# Altium PCB LED6432Clock.PcbDoc (part 4 of 6)
Units mm, origin at the board's own origin, x right, y up, seen from the top; angles counter-clockwise.
Board outline 152.4 x 101.6 mm, 2 copper layers (Top Layer, Bottom Layer); 48 components, 0 nets, 638 pads, 127 vias.
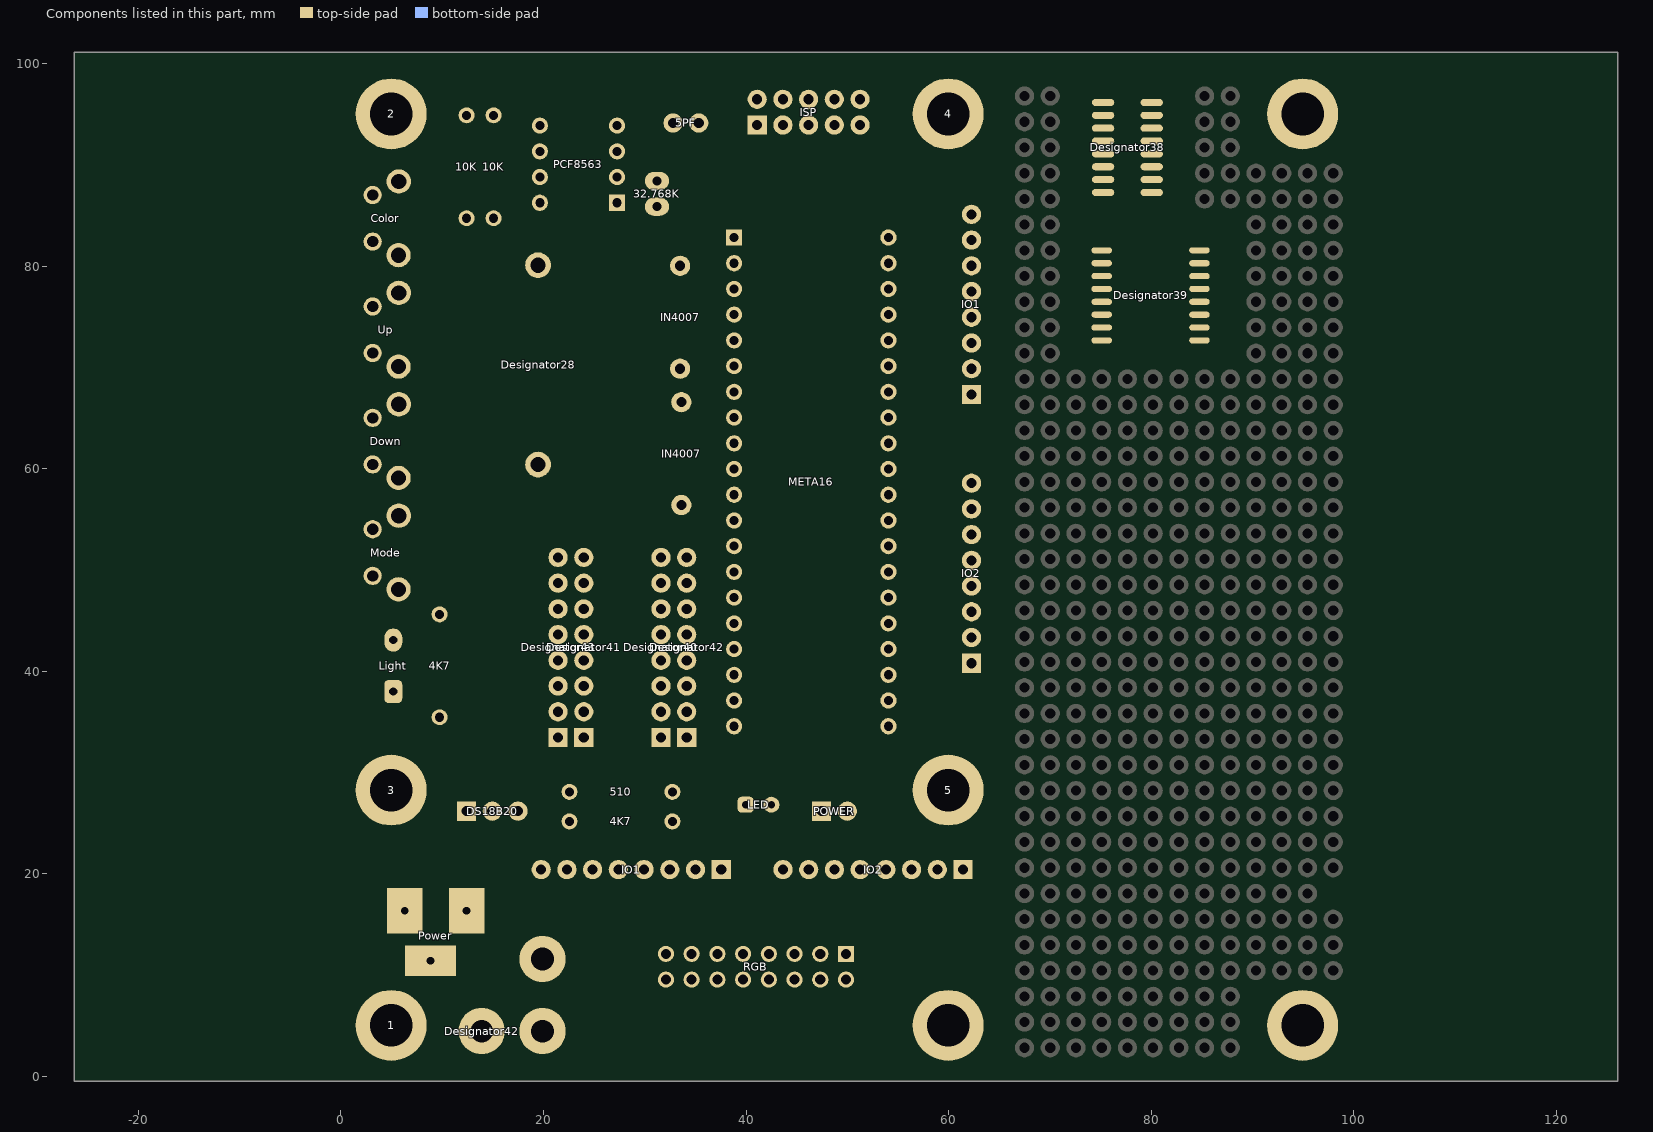
[diagram p4: the components of this part, seen from the top]

## Via types
v1: diameter 0.6, hole 0.3, Top Layer to Bottom Layer, 67 vias
v2: diameter 1.27, hole 0.711, Top Layer to Bottom Layer, 60 vias

## Nets (pads, with @x,y where several pads share a name; then routed paths per layer and width w, separated by ;. In a path a pad name is that pad's centre, name@x,y a point inside that pad or via, vN(x,y) a via of type N, cw(c..) or ccw(c..) an arc to the next point about the centre after c; other vN are vias at no path point) (continued)
copper on no net: (continued)
  Top Layer w0.4: 1.268,37.777 4.941,37.777 5.162,37.998 ; 1.925,30.438 ccw(c3.044,30.738) v2@2.588,29.674 ; v2@2.686,30.062 ccw(c2.81,30.528) 3.156,30.192 ccw(c3.56,29.799) v2@3.003,29.71 ; v2@2.919,29.599 1.268,31.25 ; 2.919,87.053 2.487,87.053 1.268,85.834 ; 3.13,65.022 2.936,64.828 1.268,64.828 ; 3.13,76.022 2.996,76.157 1.192,76.157 ; 3.257,54.022 3.167,53.932 1.268,53.932 ; 5.162,43.078 7.407,43.078 9.734,40.751 9.734,35.458 ; 6.375,27.234 cw(c6.468,26.093) v2@7.311,26.868 ; 6.5,26.347 6.627,26.22 12.139,26.22 ; 6.655,27.547 cw(c6.359,26.61) v2@7.303,26.882 ; 6.968,28.009 ccw(c8.486,27.938) v2@7.363,26.915 ; 7.073,27.486 cw(c6.871,27.069) v2@7.304,26.904 ; v2@7.212,26.445 cw(c8.013,25.798) 8.527,26.689 ; v2@7.353,26.861 cw(c7.782,26.061) 8.246,26.84 ; v2@7.355,26.862 cw(c7.648,26.39) 8.04,26.782 ; v2@7.369,29.628 ccw(c7.853,29.421) 7.558,28.985 ; v2@7.45,26.471 cw(c7.751,25.345) 8.334,26.355 ; v2@7.454,26.472 cw(c7.623,25.87) 8.029,26.346 cw(c8.503,26.902) v2@7.772,26.895 ; 7.485,26.148 cw(c8.045,25.679) 8.41,26.311 cw(c8.782,26.956) 8.077,27.197 ; 7.523,26.193 cw(c8.381,25.501) 8.932,26.456 cw(c9.644,27.689) 8.231,27.863 ; v2@7.542,26.508 cw(c8.171,25.334) 8.854,26.477 ; v2@7.566,26.522 cw(c7.92,25.949) 8.397,26.425 cw(c9.108,27.134) 8.139,27.398 ; 7.59,26.279 cw(c8.193,25.824) 8.089,26.572 ; v2@7.737,29.47 ccw(c8.306,29.226) 7.959,28.713 ; v2@7.757,27.004 ccw(c8.66,27.246) 8.193,26.436 ; 7.834,27.912 ccw(c8.993,27.769) 8.409,26.758 ; 9.65,45.855 9.65,50.706 9.65,55.202 10.132,55.684 10.132,84.285 10.742,84.894 ; 9.967,55.734 cw(c10.519,55.586) v1@10.233,56.08 ; 12.313,94.729 cw(c11.278,92.791) 13.4,93.36 ; 12.401,84.734 15.068,84.734 ; 12.401,94.894 12.401,94.259 14.501,92.159 18.82,92.159 ; 12.502,95.082 cw(c11.873,93.906) 13.161,94.251 ; 12.571,84.894 10.742,84.894 ; 12.83,93.994 cw(c13.603,94.201) 12.91,94.601 ; 15.068,94.894 16.439,94.894 ; 19.276,60.587 19.726,61.036 v1(19.726,69.875) ; 19.455,80.099 22.142,80.099 22.558,80.099 24.915,82.456 24.915,91.533 27.26,93.878 27.26,95.088 ; 19.64,91.338 18.82,92.159 ; 19.64,93.878 17.455,93.878 16.439,94.894 ; 21.359,38.819 23.696,38.819 ; 21.435,33.459 23.62,33.459 ; 21.435,35.999 23.975,35.999 ; 21.435,41.079 23.975,41.079 ; 21.435,43.619 23.975,43.619 ; 21.435,46.159 23.62,46.159 ; 21.435,51.239 23.518,51.239 ; 21.664,48.649 23.925,48.649 ; 22.028,48.24 cw(c22.624,47.778) 22.819,48.506 cw(c23.13,49.666) 22.087,49.071 ; 22.058,33.041 cw(c22.589,32.683) 22.754,33.301 cw(c23.031,34.336) 22.093,33.82 ; 22.058,33.878 ccw(c22.589,34.236) 22.754,33.617 ccw(c23.031,32.583) 22.093,33.098 ; 22.058,35.581 cw(c22.589,35.223) 22.754,35.841 cw(c23.031,36.876) 22.093,36.36 ; 22.058,36.418 ccw(c22.589,36.776) 22.754,36.157 ccw(c23.031,35.123) 22.093,35.638 ; 22.058,40.661 cw(c22.589,40.303) 22.754,40.921 cw(c23.031,41.956) 22.093,41.44 ; 22.058,41.498 ccw(c22.589,41.856) 22.754,41.237 ccw(c23.031,40.203) 22.093,40.718 ; 22.058,43.201 cw(c22.589,42.843) 22.754,43.461 cw(c23.031,44.496) 22.093,43.98 ; 22.058,44.038 ccw(c22.589,44.396) 22.754,43.777 ccw(c23.031,42.743) 22.093,43.258 ; 22.058,45.741 cw(c22.589,45.383) 22.754,46.001 cw(c23.031,47.036) 22.093,46.52 ; 22.058,46.578 ccw(c22.589,46.936) 22.754,46.317 ccw(c23.031,45.283) 22.093,45.798 ; 22.058,50.821 cw(c22.589,50.463) 22.754,51.081 cw(c23.031,52.116) 22.093,51.6 ; 22.058,51.658 ccw(c22.589,52.016) 22.754,51.397 ccw(c23.031,50.363) 22.093,50.878 ; 22.086,49.073 ccw(c22.551,49.34) 22.689,48.822 ccw(c22.933,47.912) 22.099,48.35 ; 26.542,93.435 cw(c27.398,93.206) 27.22,94.074 ; 26.817,93.16 ccw(c26.588,94.016) 27.456,93.838 ; 27.26,86.258 30.816,86.258 31.197,85.877 33.696,85.877 34.313,86.495 34.313,89.136 32.789,90.66 32.789,94.14 ; 27.26,88.798 27.641,88.417 31.197,88.417 ; 27.428,88.689 cw(c27.95,88.35) 28.262,88.889 ; 27.753,88.455 cw(c27.971,88.303) 28.105,88.534 cw(c28.365,88.984) 27.852,88.898 ; 27.763,88.471 cw(c28.305,88.119) 28.627,88.678 ; 29.922,86.106 cw(c29.61,85.564) 30.217,85.712 ; 31.519,33.383 31.595,33.459 34.135,33.459 ; 31.595,35.999 34.135,35.999 ; 31.595,38.539 34.135,38.539 ; 31.595,41.079 34.135,41.079 ; 31.595,46.159 34.135,46.159 ; 31.595,48.699 34.135,48.699 ; 31.595,51.239 34.135,51.239 ; 31.799,43.746 34.008,43.746 ; 32.413,79.027 cw(c33.764,78.666) 33.483,80.035 ; 32.475,78.965 ccw(c32.114,80.316) 33.483,80.035 ; 33.446,43.323 ccw(c33.082,43.166) 32.979,43.55 ccw(c32.784,44.277) 33.461,43.948 ; 33.478,33.098 ccw(c32.54,32.583) 32.817,33.617 ccw(c32.982,34.236) 33.513,33.878 ; 33.478,33.82 cw(c32.54,34.336) 32.817,33.301 cw(c32.982,32.683) 33.513,33.041 ; 33.478,35.638 ccw(c32.54,35.123) 32.817,36.157 ccw(c32.982,36.776) 33.513,36.418 ; 33.478,36.36 cw(c32.54,36.876) 32.817,35.841 cw(c32.982,35.223) 33.513,35.581 ; 33.478,38.178 ccw(c32.54,37.663) 32.817,38.697 ccw(c32.982,39.316) 33.513,38.958 ; 33.478,38.9 cw(c32.54,39.416) 32.817,38.381 cw(c32.982,37.763) 33.513,38.121 ; 33.478,40.718 ccw(c32.54,40.203) 32.817,41.237 ccw(c32.982,41.856) 33.513,41.498 ; 33.478,41.44 cw(c32.54,41.956) 32.817,40.921 cw(c32.982,40.303) 33.513,40.661 ; 33.478,45.798 ccw(c32.54,45.283) 32.817,46.317 ccw(c32.982,46.936) 33.513,46.578 ; 33.478,46.52 cw(c32.54,47.036) 32.817,46.001 cw(c32.982,45.383) 33.513,45.741 ; 33.478,48.338 ccw(c32.54,47.823) 32.817,48.857 ccw(c32.982,49.476) 33.513,49.118 ; 33.478,49.06 cw(c32.54,49.576) 32.817,48.541 cw(c32.982,47.923) 33.513,48.281 ; 33.478,50.878 ccw(c32.54,50.363) 32.817,51.397 ccw(c32.982,52.016) 33.513,51.658 ; 33.478,51.6 cw(c32.54,52.116) 32.817,51.081 cw(c32.982,50.463) 33.513,50.821 ; 33.61,66.573 32.365,66.573 ; 34.09,43.641 cw(c35.859,42.807) 35.353,44.696 ; v1(34.415,31.148) 34.415,33.18 34.135,33.459 ; 34.473,43.525 cw(c35.485,43.243) 35.213,44.258 ; 34.51,44.269 ccw(c34.839,44.837) 35.008,44.203 ; 35.329,94.14 35.329,95.842 ; v1(36.599,45.448) 35.05,43.899 34.034,43.899 33.881,43.746 35.634,43.746 ; 42.5,26.822 v1(42.5,31.106) v1@42.517,31.123 ; 47.453,26.187 v1@47.453,58.419 ; 47.453,58.275 47.453,59.884 v1(47.496,59.926) ; 49.993,26.187 49.993,55.6 ; 49.993,55.278 49.993,59.071 v1(49.993,59.96) 50.01,59.977 50.01,89.644 v1(50.003,89.652) ; 53.884,59.869 ccw(c55.18,60.617) 54.793,59.172 ; 54.057,59.969 54.915,59.969 ; 54.231,60.069 ccw(c56.362,61.3) 55.725,58.922 ; 54.238,60.054 ccw(c55.06,60.441) 54.825,59.564 ; 54.357,59.45 cw(c54.752,58.767) 54.956,59.529 ; 61.837,42.71 cw(c61.479,42.179) 62.097,42.014 cw(c63.132,41.737) 62.616,42.675 ; 61.837,45.25 cw(c61.479,44.719) 62.097,44.554 cw(c63.132,44.277) 62.616,45.215 ; 61.894,42.675 cw(c61.379,41.737) 62.413,42.014 cw(c63.032,42.179) 62.674,42.71 ; 61.894,45.215 cw(c61.379,44.277) 62.413,44.554 cw(c63.032,44.719) 62.674,45.25 ; 62.255,40.792 62.255,45.872 60.477,45.872 ; 1.192,76.157 cw(c1.192,74.187) 2.622,75.541 ccw(c1.192,74.187) 1.192,76.157 ; 1.268,31.249 cw(c-0.197,29.785) 1.79,29.199 ccw(c-0.197,29.785) 1.268,31.249 ; 1.268,31.249 ccw(c2.348,32.33) 3.173,31.044 cw(c2.348,32.33) 1.268,31.249 ; 1.268,31.25 1.268,85.834 ; 1.268,53.932 ccw(c1.268,55.821) 2.627,54.509 cw(c1.268,55.821) 1.268,53.932 ; 1.268,64.828 ccw(c1.268,66.516) 2.584,65.46 cw(c1.268,66.516) 1.268,64.828 ; 1.268,85.834 cw(c2.587,84.515) 2.982,86.338 ccw(c2.587,84.515) 1.268,85.834 ; 2.051,30.509 cw(c1.689,29.735) v2@2.539,29.645 ; 2.051,30.509 cw(c1.689,29.735) v2@2.539,29.645 ; 2.051,30.509 cw(c1.689,29.735) v2@2.539,29.645 ; v2@2.604,29.624 cw(c3.938,28.88) 3.574,30.363 ; v2@2.604,29.624 cw(c3.938,28.88) 3.574,30.363 ; v2@2.604,29.624 cw(c3.938,28.88) 3.574,30.363 ; 5.906,27.513 ccw(c6.739,28.564) v2@7.191,27.301 ; 5.906,27.513 ccw(c6.739,28.564) v2@7.191,27.301 ; 5.906,27.513 ccw(c6.739,28.564) v2@7.191,27.301 ; 5.986,26.977 ccw(c6.388,27.633) v2@6.994,27.159 ; 5.986,26.977 ccw(c6.388,27.633) v2@6.994,27.159 ; 5.986,26.977 ccw(c6.388,27.633) v2@6.994,27.159 ; 6.176,27.876 ccw(c7.43,29.026) v2@7.356,27.326 ; 6.176,27.876 ccw(c7.43,29.026) v2@7.356,27.326 ; 6.176,27.876 ccw(c7.43,29.026) v2@7.356,27.326 ; 6.368,26.743 ccw(c6.743,27.355) v2@7.309,26.913 ; 6.368,26.743 ccw(c6.743,27.355) v2@7.309,26.913 ; 6.368,26.743 ccw(c6.743,27.355) v2@7.309,26.913 ; 6.47,27.066 ccw(c7.025,27.765) v2@7.325,26.924 ; 6.47,27.066 ccw(c7.025,27.765) v2@7.325,26.924 ; 6.47,27.066 ccw(c7.025,27.765) v2@7.325,26.924 ; 6.723,28.456 cw(c5.326,27.532) v2@6.922,27.023 ; 6.723,28.456 cw(c5.326,27.532) v2@6.922,27.023 ; 6.723,28.456 cw(c5.326,27.532) v2@6.922,27.023 ; 6.731,27.841 cw(c5.773,27.191) v2@6.91,26.973 ; 6.731,27.841 cw(c5.773,27.191) v2@6.91,26.973 ; 6.731,27.841 cw(c5.773,27.191) v2@6.91,26.973 ; 6.75,26.509 ccw(c7.099,27.078) v2@7.625,26.667 ; 6.75,26.509 ccw(c7.099,27.078) v2@7.625,26.667 ; 6.75,26.509 ccw(c7.099,27.078) v2@7.625,26.667 ; 6.816,27.716 ccw(c7.596,28.245) v2@7.419,27.319 ; 6.816,27.716 ccw(c7.596,28.245) v2@7.419,27.319 ; 6.816,27.716 ccw(c7.596,28.245) v2@7.419,27.319 ; 6.826,43.078 cw(c6.826,44.742) 5.65,43.566 ccw(c6.826,44.742) 6.826,43.078 ; 6.826,43.078 ccw(c6.826,41.415) 5.65,42.591 cw(c6.826,41.415) 6.826,43.078 ; v2@7.045,26.672 ccw(c7.963,27.363) 7.803,26.225 ; v2@7.045,26.672 ccw(c7.963,27.363) 7.803,26.225 ; v2@7.045,26.672 ccw(c7.963,27.363) 7.803,26.225 ; v2@7.067,27.233 ccw(c6.57,27.861) 7.245,28.294 ; v2@7.067,27.233 ccw(c6.57,27.861) 7.245,28.294 ; v2@7.067,27.233 ccw(c6.57,27.861) 7.245,28.294 ; v2@7.073,27.143 cw(c7.605,26.637) 8.033,27.234 ; v2@7.073,27.143 cw(c7.605,26.637) 8.033,27.234 ; v2@7.073,27.143 cw(c7.605,26.637) 8.033,27.234 ; 7.185,27.759 cw(c6.349,27.206) v2@7.304,26.902 ; 7.185,27.759 cw(c6.349,27.206) v2@7.304,26.902 ; 7.185,27.759 cw(c6.349,27.206) v2@7.304,26.902 ; v2@7.195,29.23 cw(c6.719,27.853) 8.029,28.49 ; v2@7.195,29.23 cw(c6.719,27.853) 8.029,28.49 ; v2@7.195,29.23 cw(c6.719,27.853) 8.029,28.49 ; v2@7.315,26.919 ccw(c6.845,27.513) 7.483,27.921 ; v2@7.315,26.919 ccw(c6.845,27.513) 7.483,27.921 ; v2@7.315,26.919 ccw(c6.845,27.513) 7.483,27.921 ; v2@7.352,26.86 cw(c7.737,26.024) 8.181,26.831 ; v2@7.352,26.86 cw(c7.737,26.024) 8.181,26.831 ; v2@7.352,26.86 cw(c7.737,26.024) 8.181,26.831 ; v2@7.362,26.867 cw(c7.941,26.317) 8.406,26.966 ; v2@7.362,26.867 cw(c7.941,26.317) 8.406,26.966 ; v2@7.362,26.867 cw(c7.941,26.317) 8.406,26.966 ; v2@7.366,26.911 ccw(c8.761,27.872) 8.453,26.206 ; v2@7.366,26.911 ccw(c8.761,27.872) 8.453,26.206 ; v2@7.366,26.911 ccw(c8.761,27.872) 8.453,26.206 ; v2@7.367,26.909 ccw(c8.148,27.359) 7.914,26.489 ; v2@7.367,26.909 ccw(c8.148,27.359) 7.914,26.489 ; v2@7.367,26.909 ccw(c8.148,27.359) 7.914,26.489 ; v2@7.401,29.211 cw(c7.454,28.859) 7.774,29.015 ; v2@7.401,29.211 cw(c7.454,28.859) 7.774,29.015 ; v2@7.401,29.211 cw(c7.454,28.859) 7.774,29.015 ; v2@7.507,26.491 cw(c8.01,25.304) 8.494,26.499 ; v2@7.507,26.491 cw(c8.01,25.304) 8.494,26.499 ; v2@7.507,26.491 cw(c8.01,25.304) 8.494,26.499 ; v2@7.519,26.497 cw(c8.15,25.132) 8.875,26.449 ; v2@7.519,26.497 cw(c8.15,25.132) 8.875,26.449 ; v2@7.519,26.497 cw(c8.15,25.132) 8.875,26.449 ; v2@7.563,26.605 ccw(c7.121,27.165) 7.721,27.549 ; v2@7.563,26.605 ccw(c7.121,27.165) 7.721,27.549 ; v2@7.563,26.605 ccw(c7.121,27.165) 7.721,27.549 ; v2@7.652,26.592 cw(c8.277,25.997) 8.78,26.698 ; v2@7.652,26.592 cw(c8.277,25.997) 8.78,26.698 ; v2@7.652,26.592 cw(c8.277,25.997) 8.78,26.698 ; v2@7.714,27.109 ccw(c9.331,28.041) 8.847,26.238 ; v2@7.714,27.109 ccw(c9.331,28.041) 8.847,26.238 ; v2@7.714,27.109 ccw(c9.331,28.041) 8.847,26.238 ; v2@7.737,27.061 ccw(c8.484,27.378) 8.18,26.626 ; v2@7.737,27.061 ccw(c8.484,27.378) 8.18,26.626 ; v2@7.737,27.061 ccw(c8.484,27.378) 8.18,26.626 ; v2@7.747,29.496 ccw(c8.336,29.288) 7.774,29.015 ; v2@7.747,29.496 ccw(c8.336,29.288) 7.774,29.015 ; v2@7.747,29.496 ccw(c8.336,29.288) 7.774,29.015 ; v2@7.748,29.499 ccw(c8.356,29.289) 7.777,29.008 ; v2@7.748,29.499 ccw(c8.356,29.289) 7.777,29.008 ; v2@7.748,29.499 ccw(c8.356,29.289) 7.777,29.008 ; 9.734,36.877 cw(c8.316,36.877) 9.319,35.874 ccw(c8.316,36.877) 9.734,36.877 ; 9.734,36.877 ccw(c11.153,36.877) 10.15,35.874 cw(c11.153,36.877) 9.734,36.877 ; 10.556,26.398 ccw(c10.84,28.069) 11.922,26.765 ; 10.556,26.398 ccw(c10.84,28.069) 11.922,26.765 ; 10.556,26.398 ccw(c10.84,28.069) 11.922,26.765 ; 10.568,26.583 ccw(c10.996,28.437) 12.004,26.823 ; 10.568,26.583 ccw(c10.996,28.437) 12.004,26.823 ; 10.568,26.583 ccw(c10.996,28.437) 12.004,26.823 ; 10.695,26.554 cw(c10.308,24.879) 11.765,25.79 ; 10.695,26.554 cw(c10.308,24.879) 11.765,25.79 ; 10.695,26.554 cw(c10.308,24.879) 11.765,25.79 ; 10.742,84.894 cw(c10.742,83.266) 11.961,84.345 ccw(c10.742,83.266) 10.742,84.894 ; 10.84,26.349 cw(c10.595,24.905) 11.79,25.753 ; 10.84,26.349 cw(c10.595,24.905) 11.79,25.753 ; 10.84,26.349 cw(c10.595,24.905) 11.79,25.753 ; 11.415,26.252 ccw(c11.574,27.185) 12.178,26.457 ; 11.415,26.252 ccw(c11.574,27.185) 12.178,26.457 ; 11.415,26.252 ccw(c11.574,27.185) 12.178,26.457 ; 12.139,26.22 cw(c12.139,30.419) 8.116,29.214 ccw(c12.139,30.419) 12.139,26.22 ; 13.65,84.734 cw(c13.65,83.316) 14.653,84.319 ccw(c13.65,83.316) 13.65,84.734 ; 13.65,84.734 ccw(c13.65,86.153) 14.653,85.15 cw(c13.65,86.153) 13.65,84.734 ; 13.82,84.734 cw(c13.82,86.153) 12.817,85.15 ccw(c13.82,86.153) 13.82,84.734 ; 13.82,84.734 ccw(c13.82,83.316) 12.817,84.319 cw(c13.82,83.316) 13.82,84.734 ; 16.439,94.894 cw(c16.439,96.2) 15.494,95.3 ccw(c16.439,96.2) 16.439,94.894 ; 16.439,94.894 ccw(c16.439,93.589) 15.494,94.489 cw(c16.439,93.589) 16.439,94.894 ; 18.192,93.878 cw(c18.192,92.43) 19.216,93.454 ccw(c18.192,92.43) 18.192,93.878 ; 18.192,93.878 ccw(c18.192,95.327) 19.216,94.303 cw(c18.192,95.327) 18.192,93.878 ; 18.82,92.159 cw(c18.239,91.578) 19.049,91.439 ccw(c18.239,91.578) 18.82,92.159 ; 18.82,92.159 ccw(c19.401,92.74) 19.539,91.93 cw(c19.401,92.74) 18.82,92.159 ; 21.073,80.099 cw(c21.073,81.716) 19.929,80.573 ccw(c21.073,81.716) 21.073,80.099 ; 21.073,80.099 ccw(c21.073,78.481) 19.929,79.625 cw(c21.073,78.481) 21.073,80.099 ; 22.039,80.099 cw(c22.039,82.682) 20.212,80.856 ccw(c22.039,82.682) 22.039,80.099 ; 22.039,80.099 ccw(c22.039,77.516) 20.212,79.342 cw(c22.039,77.516) 22.039,80.099 ; 22.165,33.459 cw(c22.165,31.649) 23.445,32.929 ccw(c22.165,31.649) 22.165,33.459 ; 22.165,33.459 ccw(c22.165,35.27) 23.445,33.99 cw(c22.165,35.27) 22.165,33.459 ; 22.165,35.999 cw(c22.165,34.189) 23.445,35.469 ccw(c22.165,34.189) 22.165,35.999 ; 22.165,35.999 ccw(c22.165,37.81) 23.445,36.53 cw(c22.165,37.81) 22.165,35.999 ; 22.165,41.079 cw(c22.165,39.269) 23.445,40.549 ccw(c22.165,39.269) 22.165,41.079 ; 22.165,41.079 ccw(c22.165,42.89) 23.445,41.61 cw(c22.165,42.89) 22.165,41.079 ; 22.165,43.619 cw(c22.165,41.809) 23.445,43.089 ccw(c22.165,41.809) 22.165,43.619 ; 22.165,43.619 ccw(c22.165,45.43) 23.445,44.15 cw(c22.165,45.43) 22.165,43.619 ; 22.165,46.159 cw(c22.165,44.349) 23.445,45.629 ccw(c22.165,44.349) 22.165,46.159 ; 22.165,46.159 ccw(c22.165,47.97) 23.445,46.69 cw(c22.165,47.97) 22.165,46.159 ; 22.165,51.239 cw(c22.165,49.429) 23.445,50.709 ccw(c22.165,49.429) 22.165,51.239 ; 22.165,51.239 ccw(c22.165,53.05) 23.445,51.77 cw(c22.165,53.05) 22.165,51.239 ; 22.592,48.506 cw(c22.787,47.778) 23.383,48.24 ; 22.592,48.506 ccw(c22.281,49.666) 23.324,49.071 ; 22.592,48.506 cw(c22.787,47.778) 23.383,48.24 ; 22.592,48.506 ccw(c22.281,49.666) 23.324,49.071 ; 22.592,48.506 cw(c22.787,47.778) 23.383,48.24 ; 22.592,48.506 ccw(c22.281,49.666) 23.324,49.071 ; 22.657,33.301 cw(c22.822,32.683) 23.353,33.041 ; 22.657,33.301 ccw(c22.38,34.336) 23.318,33.82 ; 22.657,33.301 cw(c22.822,32.683) 23.353,33.041 ; 22.657,33.301 ccw(c22.38,34.336) 23.318,33.82 ; 22.657,33.301 cw(c22.822,32.683) 23.353,33.041 ; 22.657,33.301 ccw(c22.38,34.336) 23.318,33.82 ; 22.657,33.617 cw(c22.38,32.583) 23.318,33.098 ; 22.657,33.617 ccw(c22.822,34.236) 23.353,33.878 ; 22.657,33.617 cw(c22.38,32.583) 23.318,33.098 ; 22.657,33.617 ccw(c22.822,34.236) 23.353,33.878 ; 22.657,33.617 cw(c22.38,32.583) 23.318,33.098 ; 22.657,33.617 ccw(c22.822,34.236) 23.353,33.878 ; 22.657,35.841 cw(c22.822,35.223) 23.353,35.581 ; 22.657,35.841 ccw(c22.38,36.876) 23.318,36.36 ; 22.657,35.841 cw(c22.822,35.223) 23.353,35.581 ; 22.657,35.841 ccw(c22.38,36.876) 23.318,36.36 ; 22.657,35.841 cw(c22.822,35.223) 23.353,35.581 ; 22.657,35.841 ccw(c22.38,36.876) 23.318,36.36 ; 22.657,36.157 cw(c22.38,35.123) 23.318,35.638 ; 22.657,36.157 ccw(c22.822,36.776) 23.353,36.418 ; 22.657,36.157 cw(c22.38,35.123) 23.318,35.638 ; 22.657,36.157 ccw(c22.822,36.776) 23.353,36.418 ; 22.657,36.157 cw(c22.38,35.123) 23.318,35.638 ; 22.657,36.157 ccw(c22.822,36.776) 23.353,36.418 ; 22.657,40.921 cw(c22.822,40.303) 23.353,40.661 ; 22.657,40.921 ccw(c22.38,41.956) 23.318,41.44 ; 22.657,40.921 cw(c22.822,40.303) 23.353,40.661 ; 22.657,40.921 ccw(c22.38,41.956) 23.318,41.44 ; 22.657,40.921 cw(c22.822,40.303) 23.353,40.661 ; 22.657,40.921 ccw(c22.38,41.956) 23.318,41.44 ; 22.657,41.237 cw(c22.38,40.203) 23.318,40.718 ; 22.657,41.237 ccw(c22.822,41.856) 23.353,41.498 ; 22.657,41.237 cw(c22.38,40.203) 23.318,40.718 ; 22.657,41.237 ccw(c22.822,41.856) 23.353,41.498 ; 22.657,41.237 cw(c22.38,40.203) 23.318,40.718 ; 22.657,41.237 ccw(c22.822,41.856) 23.353,41.498 ; 22.657,43.461 cw(c22.822,42.843) 23.353,43.201 ; 22.657,43.461 ccw(c22.38,44.496) 23.318,43.98 ; 22.657,43.461 cw(c22.822,42.843) 23.353,43.201 ; 22.657,43.461 ccw(c22.38,44.496) 23.318,43.98 ; 22.657,43.461 cw(c22.822,42.843) 23.353,43.201 ; 22.657,43.461 ccw(c22.38,44.496) 23.318,43.98 ; 22.657,43.777 cw(c22.38,42.743) 23.318,43.258 ; 22.657,43.777 ccw(c22.822,44.396) 23.353,44.038 ; 22.657,43.777 cw(c22.38,42.743) 23.318,43.258 ; 22.657,43.777 ccw(c22.822,44.396) 23.353,44.038 ; 22.657,43.777 cw(c22.38,42.743) 23.318,43.258 ; 22.657,43.777 ccw(c22.822,44.396) 23.353,44.038 ; 22.657,46.001 cw(c22.822,45.383) 23.353,45.741 ; 22.657,46.001 ccw(c22.38,47.036) 23.318,46.52 ; 22.657,46.001 cw(c22.822,45.383) 23.353,45.741 ; 22.657,46.001 ccw(c22.38,47.036) 23.318,46.52 ; 22.657,46.001 cw(c22.822,45.383) 23.353,45.741 ; 22.657,46.001 ccw(c22.38,47.036) 23.318,46.52 ; 22.657,46.317 cw(c22.38,45.283) 23.318,45.798 ; 22.657,46.317 ccw(c22.822,46.936) 23.353,46.578 ; 22.657,46.317 cw(c22.38,45.283) 23.318,45.798 ; 22.657,46.317 ccw(c22.822,46.936) 23.353,46.578 ; 22.657,46.317 cw(c22.38,45.283) 23.318,45.798 ; 22.657,46.317 ccw(c22.822,46.936) 23.353,46.578 ; 22.657,51.081 cw(c22.822,50.463) 23.353,50.821 ; 22.657,51.081 ccw(c22.38,52.116) 23.318,51.6 ; 22.657,51.081 cw(c22.822,50.463) 23.353,50.821 ; 22.657,51.081 ccw(c22.38,52.116) 23.318,51.6 ; 22.657,51.081 cw(c22.822,50.463) 23.353,50.821 ; 22.657,51.081 ccw(c22.38,52.116) 23.318,51.6 ; 22.657,51.397 cw(c22.38,50.363) 23.318,50.878 ; 22.657,51.397 ccw(c22.822,52.016) 23.353,51.658 ; 22.657,51.397 cw(c22.38,50.363) 23.318,50.878 ; 22.657,51.397 ccw(c22.822,52.016) 23.353,51.658 ; 22.657,51.397 cw(c22.38,50.363) 23.318,50.878 ; 22.657,51.397 ccw(c22.822,52.016) 23.353,51.658 ; 22.722,48.822 cw(c22.478,47.912) 23.312,48.35 ; 22.721,48.822 ccw(c22.86,49.34) 23.325,49.073 ; 22.722,48.822 cw(c22.478,47.912) 23.312,48.35 ; 22.721,48.822 ccw(c22.86,49.34) 23.325,49.073 ; 22.722,48.822 cw(c22.478,47.912) 23.312,48.35 ; 22.721,48.822 ccw(c22.86,49.34) 23.325,49.073 ; 23.246,33.459 cw(c23.246,35.27) 21.966,33.99 ccw(c23.246,35.27) 23.246,33.459 ; 23.246,33.459 ccw(c23.246,31.649) 21.966,32.929 cw(c23.246,31.649) 23.246,33.459 ; 23.246,35.999 cw(c23.246,37.81) 21.966,36.53 ccw(c23.246,37.81) 23.246,35.999 ; 23.246,35.999 ccw(c23.246,34.189) 21.966,35.469 cw(c23.246,34.189) 23.246,35.999 ; 23.246,41.079 cw(c23.246,42.89) 21.966,41.61 ccw(c23.246,42.89) 23.246,41.079 ; 23.246,41.079 ccw(c23.246,39.269) 21.966,40.549 cw(c23.246,39.269) 23.246,41.079 ; 23.246,43.619 cw(c23.246,45.43) 21.966,44.15 ccw(c23.246,45.43) 23.246,43.619 ; 23.246,43.619 ccw(c23.246,41.809) 21.966,43.089 cw(c23.246,41.809) 23.246,43.619 ; 23.246,46.159 cw(c23.246,47.97) 21.966,46.69 ccw(c23.246,47.97) 23.246,46.159 ; 23.246,46.159 ccw(c23.246,44.349) 21.966,45.629 cw(c23.246,44.349) 23.246,46.159 ; 23.246,51.239 cw(c23.246,53.05) 21.966,51.77 ccw(c23.246,53.05) 23.246,51.239 ; 23.246,51.239 ccw(c23.246,49.429) 21.966,50.709 cw(c23.246,49.429) 23.246,51.239 ; 23.696,38.819 ccw(c23.696,36.572) 22.001,38.047 cw(c23.696,36.572) 23.696,38.819 ; 26.236,92.854 cw(c27.26,91.83) 27.26,93.278 ccw(c27.26,91.83) 26.236,92.854 ; 26.236,92.854 ccw(c25.212,93.878) 26.66,93.878 cw(c25.212,93.878) 26.236,92.854 ; 27.26,95.088 cw(c26.341,95.088) 26.897,94.356 ccw(c26.341,95.088) 27.26,95.088 ; 27.26,95.088 ccw(c28.18,95.088) 27.623,94.356 cw(c28.18,95.088) 27.26,95.088 ; 27.26,95.088 28.573,96.401 34.77,96.401 35.329,95.842 ; 28.709,86.258 cw(c28.709,87.707) 27.685,86.683 ccw(c28.709,87.707) 28.709,86.258 ; 28.709,86.258 ccw(c28.709,84.81) 27.685,85.834 cw(c28.709,84.81) 28.709,86.258 ; 29.207,88.417 cw(c29.207,86.727) 30.402,87.922 ccw(c29.207,86.727) 29.207,88.417 ; 29.207,88.417 ccw(c29.207,90.107) 30.402,88.912 cw(c29.207,90.107) 29.207,88.417 ; 32.118,78.67 cw(c33.483,77.304) 33.483,79.235 ccw(c33.483,77.304) 32.118,78.67 ; 32.118,78.67 ccw(c30.752,80.035) 32.683,80.035 cw(c30.752,80.035) 32.118,78.67 ; 32.218,33.041 cw(c32.749,32.683) 32.914,33.301 ; 32.218,33.041 cw(c32.749,32.683) 32.914,33.301 ; 32.218,33.041 cw(c32.749,32.683) 32.914,33.301 ; 32.218,33.878 ccw(c32.749,34.236) 32.914,33.617 ; 32.218,33.878 ccw(c32.749,34.236) 32.914,33.617 ; 32.218,33.878 ccw(c32.749,34.236) 32.914,33.617 ; 32.218,35.581 cw(c32.749,35.223) 32.914,35.841 ; 32.218,35.581 cw(c32.749,35.223) 32.914,35.841 ; 32.218,35.581 cw(c32.749,35.223) 32.914,35.841 ; 32.218,36.418 ccw(c32.749,36.776) 32.914,36.157 ; 32.218,36.418 ccw(c32.749,36.776) 32.914,36.157 ; 32.218,36.418 ccw(c32.749,36.776) 32.914,36.157 ; 32.218,38.121 cw(c32.749,37.763) 32.914,38.381 ; 32.218,38.121 cw(c32.749,37.763) 32.914,38.381 ; 32.218,38.121 cw(c32.749,37.763) 32.914,38.381 ; 32.218,38.958 ccw(c32.749,39.316) 32.914,38.697 ; 32.218,38.958 ccw(c32.749,39.316) 32.914,38.697 ; 32.218,38.958 ccw(c32.749,39.316) 32.914,38.697 ; 32.218,40.661 cw(c32.749,40.303) 32.914,40.921 ; 32.218,40.661 cw(c32.749,40.303) 32.914,40.921 ; 32.218,40.661 cw(c32.749,40.303) 32.914,40.921 ; 32.218,41.498 ccw(c32.749,41.856) 32.914,41.237 ; 32.218,41.498 ccw(c32.749,41.856) 32.914,41.237 ; 32.218,41.498 ccw(c32.749,41.856) 32.914,41.237 ; 32.218,45.741 cw(c32.749,45.383) 32.914,46.001 ; 32.218,45.741 cw(c32.749,45.383) 32.914,46.001 ; 32.218,45.741 cw(c32.749,45.383) 32.914,46.001 ; 32.218,46.578 ccw(c32.749,46.936) 32.914,46.317 ; 32.218,46.578 ccw(c32.749,46.936) 32.914,46.317 ; 32.218,46.578 ccw(c32.749,46.936) 32.914,46.317 ; 32.218,48.281 cw(c32.749,47.923) 32.914,48.541 ; 32.218,48.281 cw(c32.749,47.923) 32.914,48.541 ; 32.218,48.281 cw(c32.749,47.923) 32.914,48.541 ; 32.218,49.118 ccw(c32.749,49.476) 32.914,48.857 ; 32.218,49.118 ccw(c32.749,49.476) 32.914,48.857 ; 32.218,49.118 ccw(c32.749,49.476) 32.914,48.857 ; 32.218,50.821 cw(c32.749,50.463) 32.914,51.081 ; 32.218,50.821 cw(c32.749,50.463) 32.914,51.081 ; 32.218,50.821 cw(c32.749,50.463) 32.914,51.081 ; 32.218,51.658 ccw(c32.749,52.016) 32.914,51.397 ; 32.218,51.658 ccw(c32.749,52.016) 32.914,51.397 ; 32.218,51.658 ccw(c32.749,52.016) 32.914,51.397 ; 32.253,33.098 cw(c33.191,32.583) 32.914,33.617 ; 32.253,33.098 cw(c33.191,32.583) 32.914,33.617 ; 32.253,33.098 cw(c33.191,32.583) 32.914,33.617 ; 32.253,33.82 ccw(c33.191,34.336) 32.914,33.301 ; 32.253,33.82 ccw(c33.191,34.336) 32.914,33.301 ; 32.253,33.82 ccw(c33.191,34.336) 32.914,33.301 ; 32.253,35.638 cw(c33.191,35.123) 32.914,36.157 ; 32.253,35.638 cw(c33.191,35.123) 32.914,36.157 ; 32.253,35.638 cw(c33.191,35.123) 32.914,36.157 ; 32.253,36.36 ccw(c33.191,36.876) 32.914,35.841 ; 32.253,36.36 ccw(c33.191,36.876) 32.914,35.841 ; 32.253,36.36 ccw(c33.191,36.876) 32.914,35.841 ; 32.253,38.178 cw(c33.191,37.663) 32.914,38.697 ; 32.253,38.178 cw(c33.191,37.663) 32.914,38.697 ; 32.253,38.178 cw(c33.191,37.663) 32.914,38.697 ; 32.253,38.9 ccw(c33.191,39.416) 32.914,38.381 ; 32.253,38.9 ccw(c33.191,39.416) 32.914,38.381 ; 32.253,38.9 ccw(c33.191,39.416) 32.914,38.381 ; 32.253,40.718 cw(c33.191,40.203) 32.914,41.237 ; 32.253,40.718 cw(c33.191,40.203) 32.914,41.237 ; 32.253,40.718 cw(c33.191,40.203) 32.914,41.237 ; 32.253,41.44 ccw(c33.191,41.956) 32.914,40.921 ; 32.253,41.44 ccw(c33.191,41.956) 32.914,40.921 ; 32.253,41.44 ccw(c33.191,41.956) 32.914,40.921 ; 32.253,45.798 cw(c33.191,45.283) 32.914,46.317 ; 32.253,45.798 cw(c33.191,45.283) 32.914,46.317 ; 32.253,45.798 cw(c33.191,45.283) 32.914,46.317 ; 32.253,46.52 ccw(c33.191,47.036) 32.914,46.001 ; 32.253,46.52 ccw(c33.191,47.036) 32.914,46.001 ; 32.253,46.52 ccw(c33.191,47.036) 32.914,46.001 ; 32.253,48.338 cw(c33.191,47.823) 32.914,48.857 ; 32.253,48.338 cw(c33.191,47.823) 32.914,48.857 ; 32.253,48.338 cw(c33.191,47.823) 32.914,48.857 ; 32.253,49.06 ccw(c33.191,49.576) 32.914,48.541 ; 32.253,49.06 ccw(c33.191,49.576) 32.914,48.541 ; 32.253,49.06 ccw(c33.191,49.576) 32.914,48.541 ; 32.253,50.878 cw(c33.191,50.363) 32.914,51.397 ; 32.253,50.878 cw(c33.191,50.363) 32.914,51.397 ; 32.253,50.878 cw(c33.191,50.363) 32.914,51.397 ; 32.253,51.6 ccw(c33.191,52.116) 32.914,51.081 ; 32.253,51.6 ccw(c33.191,52.116) 32.914,51.081 ; 32.253,51.6 ccw(c33.191,52.116) 32.914,51.081 ; 32.27,43.948 ccw(c32.947,44.277) 32.752,43.55 ; 32.27,43.948 ccw(c32.947,44.277) 32.752,43.55 ; 32.27,43.948 ccw(c32.947,44.277) 32.752,43.55 ; 32.284,43.323 cw(c32.649,43.166) 32.752,43.55 ; 32.284,43.323 cw(c32.649,43.166) 32.752,43.55 ; 32.284,43.323 cw(c32.649,43.166) 32.752,43.55 ; 32.325,33.459 cw(c32.325,31.649) 33.605,32.929 ccw(c32.325,31.649) 32.325,33.459 ; 32.325,33.459 ccw(c32.325,35.27) 33.605,33.99 cw(c32.325,35.27) 32.325,33.459 ; 32.325,35.999 cw(c32.325,34.189) 33.605,35.469 ccw(c32.325,34.189) 32.325,35.999 ; 32.325,35.999 ccw(c32.325,37.81) 33.605,36.53 cw(c32.325,37.81) 32.325,35.999 ; 32.325,38.539 cw(c32.325,36.729) 33.605,38.009 ccw(c32.325,36.729) 32.325,38.539 ; 32.325,38.539 ccw(c32.325,40.35) 33.605,39.07 cw(c32.325,40.35) 32.325,38.539 ; 32.325,41.079 cw(c32.325,39.269) 33.605,40.549 ccw(c32.325,39.269) 32.325,41.079 ; 32.325,41.079 ccw(c32.325,42.89) 33.605,41.61 cw(c32.325,42.89) 32.325,41.079 ; 32.325,46.159 cw(c32.325,44.349) 33.605,45.629 ccw(c32.325,44.349) 32.325,46.159 ; 32.325,46.159 ccw(c32.325,47.97) 33.605,46.69 cw(c32.325,47.97) 32.325,46.159 ; 32.325,48.699 cw(c32.325,46.889) 33.605,48.169 ccw(c32.325,46.889) 32.325,48.699 ; 32.325,48.699 ccw(c32.325,50.51) 33.605,49.23 cw(c32.325,50.51) 32.325,48.699 ; 32.325,51.239 cw(c32.325,49.429) 33.605,50.709 ccw(c32.325,49.429) 32.325,51.239 ; 32.325,51.239 ccw(c32.325,53.05) 33.605,51.77 cw(c32.325,53.05) 32.325,51.239 ; 32.365,66.573 cw(c32.365,66.004) 32.883,66.241 ccw(c32.365,66.004) 32.365,66.573 ; 32.365,66.573 ccw(c32.365,67.143) 32.883,66.906 cw(c32.365,67.143) 32.365,66.573 ; 32.365,66.573 31.494,67.445 31.494,78.046 33.483,80.035 ; 32.789,92.329 cw(c34.6,92.329) 33.32,93.61 ccw(c34.6,92.329) 32.789,92.329 ; 32.789,92.329 ccw(c30.979,92.329) 32.259,93.61 cw(c30.979,92.329) 32.789,92.329 ; 33.187,85.877 cw(c33.187,87.567) 31.992,86.372 ccw(c33.187,87.567) 33.187,85.877 ; 33.187,85.877 ccw(c33.187,84.187) 31.992,85.382 cw(c33.187,84.187) 33.187,85.877 ; 33.406,33.459 cw(c33.406,35.27) 32.126,33.99 ccw(c33.406,35.27) 33.406,33.459 ; 33.406,33.459 ccw(c33.406,31.649) 32.126,32.929 cw(c33.406,31.649) 33.406,33.459 ; 33.406,35.999 cw(c33.406,37.81) 32.126,36.53 ccw(c33.406,37.81) 33.406,35.999 ; 33.406,35.999 ccw(c33.406,34.189) 32.126,35.469 cw(c33.406,34.189) 33.406,35.999 ; 33.406,38.539 cw(c33.406,40.35) 32.126,39.07 ccw(c33.406,40.35) 33.406,38.539 ; 33.406,38.539 ccw(c33.406,36.729) 32.126,38.009 cw(c33.406,36.729) 33.406,38.539 ; 33.406,41.079 cw(c33.406,42.89) 32.126,41.61 ccw(c33.406,42.89) 33.406,41.079 ; 33.406,41.079 ccw(c33.406,39.269) 32.126,40.549 cw(c33.406,39.269) 33.406,41.079 ; 33.406,46.159 cw(c33.406,47.97) 32.126,46.69 ccw(c33.406,47.97) 33.406,46.159 ; 33.406,46.159 ccw(c33.406,44.349) 32.126,45.629 cw(c33.406,44.349) 33.406,46.159 ; 33.406,48.699 cw(c33.406,50.51) 32.126,49.23 ccw(c33.406,50.51) 33.406,48.699 ; 33.406,48.699 ccw(c33.406,46.889) 32.126,48.169 cw(c33.406,46.889) 33.406,48.699 ; 33.406,51.239 cw(c33.406,53.05) 32.126,51.77 ccw(c33.406,53.05) 33.406,51.239 ; 33.406,51.239 ccw(c33.406,49.429) 32.126,50.709 cw(c33.406,49.429) 33.406,51.239 ; 34.135,33.459 34.339,33.663 35.99,33.663 ; 35.329,95.842 cw(c33.774,95.842) 34.823,94.694 ccw(c33.774,95.842) 35.329,95.842 ; 35.329,95.842 ccw(c36.885,95.842) 35.835,94.694 cw(c36.885,95.842) 35.329,95.842 ; 35.634,43.746 cw(c35.634,45.11) 34.667,44.148 ccw(c35.634,45.11) 35.634,43.746 ; 35.634,43.746 ccw(c35.634,42.778) 34.789,43.252 cw(c35.634,42.778) 35.634,43.746 ; 35.634,43.746 36.244,43.137 36.244,33.917 35.99,33.663 ; 35.99,33.663 ccw(c35.99,32.133) 34.745,33.023 cw(c35.99,32.133) 35.99,33.663 ; 36.348,45.253 ccw(c36.163,45.547) v1@36.502,45.47 ; 36.348,45.253 ccw(c36.163,45.547) v1@36.502,45.47 ; 36.348,45.253 ccw(c36.163,45.547) v1@36.502,45.47 ; 42.5,28.241 cw(c41.082,28.241) 42.085,27.238 ccw(c41.082,28.241) 42.5,28.241 ; 42.5,28.241 ccw(c43.919,28.241) 42.916,27.238 cw(c43.919,28.241) 42.5,28.241 ; 47.453,27.998 cw(c45.643,27.998) 46.923,26.718 ccw(c45.643,27.998) 47.453,27.998 ; 47.453,27.998 ccw(c49.264,27.998) 47.984,26.718 cw(c49.264,27.998) 47.453,27.998 ; 49.993,27.998 cw(c48.183,27.998) 49.463,26.718 ccw(c48.183,27.998) 49.993,27.998 ; 49.993,27.998 ccw(c51.804,27.998) 50.524,26.718 cw(c51.804,27.998) 49.993,27.998 ; 54.915,59.969 cw(c54.915,60.282) 54.621,60.175 ccw(c54.915,60.282) 54.915,59.969 ; 54.915,59.969 ccw(c54.915,59.657) 54.621,59.764 cw(c54.915,59.657) 54.915,59.969 ; 54.915,59.969 59.233,55.651 59.233,47.117 60.477,45.872 ; 60.477,45.872 cw(c60.477,44.14) 61.718,45.349 ccw(c60.477,44.14) 60.477,45.872 ; 60.477,45.872 ccw(c60.477,47.605) 61.718,46.396 cw(c60.477,47.605) 60.477,45.872 ; 61.837,41.415 ccw(c61.479,41.946) 62.097,42.111 ; 61.837,41.415 ccw(c61.479,41.946) 62.097,42.111 ; 61.837,41.415 ccw(c61.479,41.946) 62.097,42.111 ; 61.837,43.955 ccw(c61.479,44.486) 62.097,44.651 ; 61.837,43.955 ccw(c61.479,44.486) 62.097,44.651 ; 61.837,43.955 ccw(c61.479,44.486) 62.097,44.651 ; 61.894,41.45 ccw(c61.379,42.388) 62.413,42.111 ; 61.894,41.45 ccw(c61.379,42.388) 62.413,42.111 ; 61.894,41.45 ccw(c61.379,42.388) 62.413,42.111 ; 61.894,43.99 ccw(c61.379,44.928) 62.413,44.651 ; 61.894,43.99 ccw(c61.379,44.928) 62.413,44.651 ; 61.894,43.99 ccw(c61.379,44.928) 62.413,44.651 ; 62.097,42.111 ccw(c63.132,42.388) 62.616,41.45 ; 62.097,42.111 ccw(c63.132,42.388) 62.616,41.45 ; 62.097,42.111 ccw(c63.132,42.388) 62.616,41.45 ; 62.097,44.651 ccw(c63.132,44.928) 62.616,43.99 ; 62.097,44.651 ccw(c63.132,44.928) 62.616,43.99 ; 62.097,44.651 ccw(c63.132,44.928) 62.616,43.99 ; 62.255,41.522 cw(c64.066,41.522) 62.786,42.802 ccw(c64.066,41.522) 62.255,41.522 ; 62.255,41.522 ccw(c60.445,41.522) 61.725,42.802 cw(c60.445,41.522) 62.255,41.522 ; 62.255,42.603 cw(c60.445,42.603) 61.725,41.323 ccw(c60.445,42.603) 62.255,42.603 ; 62.255,42.603 ccw(c64.066,42.603) 62.786,41.323 cw(c64.066,42.603) 62.255,42.603 ; 62.255,44.062 cw(c64.066,44.062) 62.786,45.342 ccw(c64.066,44.062) 62.255,44.062 ; 62.255,44.062 ccw(c60.445,44.062) 61.725,45.342 cw(c60.445,44.062) 62.255,44.062 ; 62.255,45.143 cw(c60.445,45.143) 61.725,43.863 ccw(c60.445,45.143) 62.255,45.143 ; 62.255,45.143 ccw(c64.066,45.143) 62.786,43.863 cw(c64.066,45.143) 62.255,45.143 ; 62.413,42.111 ccw(c63.032,41.946) 62.674,41.415 ; 62.413,42.111 ccw(c63.032,41.946) 62.674,41.415 ; 62.413,42.111 ccw(c63.032,41.946) 62.674,41.415 ; 62.413,44.651 ccw(c63.032,44.486) 62.674,43.955 ; 62.413,44.651 ccw(c63.032,44.486) 62.674,43.955 ; 62.413,44.651 ccw(c63.032,44.486) 62.674,43.955 ; 1.618,30.9 cw(c0.359,29.641) 2.139,29.641 ccw(c0.359,29.641) 1.618,30.9 ; 1.619,30.898 ccw(c2.623,31.902) 3.389,30.707 cw(c2.623,31.902) 1.619,30.898 ; 1.659,53.932 cw(c1.659,52.551) 2.635,53.527 ccw(c1.659,52.551) 1.659,53.932 ; 1.744,30.773 cw(c0.539,29.568) 2.174,29.086 ccw(c0.539,29.568) 1.744,30.773 ; 1.765,76.157 ccw(c1.765,77.388) 2.635,76.517 cw(c1.765,77.388) 1.765,76.157 ; 1.786,86.353 cw(c2.772,85.367) 3.067,86.729 ccw(c2.772,85.367) 1.786,86.353 ; 1.909,64.828 cw(c1.909,63.801) 2.635,64.527 ccw(c1.909,63.801) 1.909,64.828 ; 1.97,30.547 ccw(c2.897,31.474) 3.605,30.371 cw(c2.897,31.474) 1.97,30.547 ; 2.101,64.828 ccw(c2.101,65.848) 2.896,65.21 cw(c2.101,65.848) 2.101,64.828 ; 2.121,76.157 cw(c2.121,75.067) 2.913,75.816 ccw(c2.121,75.067) 2.121,76.157 ; 2.21,53.932 ccw(c2.21,54.911) 2.915,54.231 cw(c2.21,54.911) 2.21,53.932 ; 2.3,30.217 cw(c1.725,29.641) 2.539,29.641 ccw(c1.725,29.641) 2.3,30.217 ; 3.419,37.777 cw(c3.419,36.001) 4.675,37.257 ccw(c3.419,36.001) 3.419,37.777 ; 3.579,37.777 ccw(c3.579,39.328) 4.675,38.232 cw(c3.579,39.328) 3.579,37.777 ; 5.051,28.295 ccw(c7.839,29.131) 7.839,26.22 cw(c7.839,29.131) 5.051,28.295 ; 5.434,28.41 ccw(c8.376,29.292) 8.376,26.22 cw(c8.376,29.292) 5.434,28.41 ; 5.818,28.525 ccw(c8.914,29.453) 8.914,26.22 cw(c8.914,29.453) 5.818,28.525 ; 6.201,28.64 ccw(c9.451,29.614) 9.451,26.22 cw(c9.451,29.614) 6.201,28.64 ; 6.584,28.754 ccw(c9.989,29.775) 9.989,26.22 cw(c9.989,29.775) 6.584,28.754 ; 6.967,28.869 ccw(c10.526,29.936) 10.526,26.22 cw(c10.526,29.936) 6.967,28.869 ; v2@7.079,26.633 ccw(c8.076,27.63) 8.076,26.22 cw(c8.076,27.63) v2@7.079,26.633 ; 7.289,25.933 cw(c7.983,25.239) 7.983,26.22 ccw(c7.983,25.239) 7.289,25.933 ; 7.35,28.984 ccw(c11.064,30.097) 11.064,26.22 cw(c11.064,30.097) 7.35,28.984 ; v2@7.362,26.916 ccw(c9.041,28.596) 9.041,26.22 cw(c9.041,28.596) v2@7.362,26.916 ; v2@7.363,26.914 ccw(c8.722,28.09) 8.592,26.298 cw(c8.722,28.09) v2@7.363,26.914 ; v2@7.645,27.199 ccw(c10.007,29.562) 10.007,26.22 cw(c10.007,29.562) v2@7.645,27.199 ; 7.733,29.099 ccw(c11.601,30.258) 11.601,26.22 cw(c11.601,30.258) 7.733,29.099 ; 9.319,46.034 ccw(c8.521,46.832) 9.65,46.832 cw(c8.521,46.832) 9.319,46.034 ; 9.65,47.241 ccw(c11.357,47.241) 10.15,46.034 cw(c11.357,47.241) 9.65,47.241 ; 9.707,55.259 ccw(c8.799,56.167) 10.083,56.167 cw(c8.799,56.167) 9.707,55.259 ; 10.132,55.803 cw(c10.547,55.803) 10.254,56.096 ccw(c10.547,55.803) 10.132,55.803 ; 10.132,56.531 ccw(c10.547,56.531) 10.254,56.238 cw(c10.547,56.531) 10.132,56.531 ; 10.511,26.22 cw(c10.511,24.297) 11.871,25.657 ccw(c10.511,24.297) 10.511,26.22 ; 10.67,26.22 ccw(c10.67,27.918) 11.871,26.718 cw(c10.67,27.918) 10.67,26.22 ; 11.37,84.894 ccw(c11.37,85.766) 11.986,85.15 cw(c11.37,85.766) 11.37,84.894 ; 11.63,84.894 cw(c11.63,84.052) 12.261,84.61 ccw(c11.63,84.052) 11.63,84.894 ; 12.589,94.894 ccw(c14.576,94.894) 13.171,93.489 cw(c14.576,94.894) 12.589,94.894 ; 12.989,94.894 ccw(c15.942,94.894) 13.854,92.806 cw(c15.942,94.894) 12.989,94.894 ; 18.699,61.171 ccw(c16.219,63.65) 19.726,63.65 cw(c16.219,63.65) 18.699,61.171 ; 18.982,60.888 ccw(c17.185,62.685) 19.726,62.685 cw(c17.185,62.685) 18.982,60.888 ; 19.264,60.605 ccw(c18.15,61.719) 19.726,61.719 cw(c18.15,61.719) 19.264,60.605 ; 19.726,62.344 ccw(c21.385,62.344) 20.212,61.171 cw(c21.385,62.344) 19.726,62.344 ; 21.49,38.819 cw(c21.49,36.054) 23.445,38.009 ccw(c21.49,36.054) 21.49,38.819 ; 21.683,48.947 ccw(c22.403,49.667) 22.403,48.649 cw(c22.403,49.667) 21.683,48.947 ; 21.699,38.31 cw(c22.818,37.337) 22.818,38.819 ccw(c22.818,37.337) 21.699,38.31 ; 21.966,39.07 ccw(c22.572,39.676) 22.572,38.819 cw(c22.572,39.676) 21.966,39.07 ; 21.966,48.169 cw(c23.123,47.011) 23.123,48.649 ccw(c23.123,47.011) 21.966,48.169 ; 21.966,49.23 ccw(c23.369,50.633) 23.369,48.649 cw(c23.369,50.633) 21.966,49.23 ; 22.042,48.649 ccw(c22.042,50.633) 23.445,49.23 cw(c22.042,50.633) 22.042,48.649 ; 22.287,48.649 cw(c22.287,47.011) 23.445,48.169 ccw(c22.287,47.011) 22.287,48.649 ; 22.456,38.819 cw(c22.456,37.02) 23.728,38.292 ccw(c22.456,37.02) 22.456,38.819 ; 22.839,38.819 ccw(c22.839,39.676) 23.445,39.07 cw(c22.839,39.676) 22.839,38.819 ; 23.008,48.649 ccw(c23.008,49.667) 23.728,48.947 cw(c23.008,49.667) 23.008,48.649 ; 27.402,88.94 ccw(c28.663,90.201) 28.663,88.417 cw(c28.663,90.201) 27.402,88.94 ; 27.685,89.223 ccw(c29.629,91.167) 29.629,88.417 cw(c29.629,91.167) 27.685,89.223 ; 28.288,86.258 cw(c28.288,83.268) 30.402,85.382 ccw(c28.288,83.268) 28.288,86.258 ; 29.253,86.258 cw(c29.253,84.233) 30.685,85.665 ccw(c29.253,84.233) 29.253,86.258 ; 31.843,43.372 cw(c32.747,42.468) 32.747,43.746 ccw(c32.747,42.468) 31.843,43.372 ; 32.018,43.746 cw(c32.018,41.502) 33.605,43.089 ccw(c32.018,41.502) 32.018,43.746 ; 32.126,43.089 cw(c33.713,41.502) 33.713,43.746 ccw(c33.713,41.502) 32.126,43.089 ; 32.126,44.15 ccw(c33.099,45.123) 33.099,43.746 cw(c33.099,45.123) 32.126,44.15 ; 32.631,43.746 ccw(c32.631,45.123) 33.605,44.15 cw(c32.631,45.123) 32.631,43.746 ; 32.984,43.746 cw(c32.984,42.468) 33.888,43.372 ccw(c32.984,42.468) 32.984,43.746 ; 33.631,32.905 cw(c32.017,31.131) 34.415,31.131 ccw(c32.017,31.131) 33.631,32.905 ; 33.9,33.201 cw(c32.84,32.036) 34.415,32.036 ccw(c32.84,32.036) 33.9,33.201 ; 34.135,43.569 ccw(c34.135,44.982) 35.134,43.983 cw(c34.135,44.982) 34.135,43.569 ; 34.135,43.969 ccw(c34.135,46.347) 35.817,44.666 cw(c34.135,46.347) 34.135,43.969 ; 34.135,44.369 ccw(c34.135,47.713) 36.5,45.349 cw(c34.135,47.713) 34.135,44.369 ; 34.415,32.323 cw(c35.272,32.323) 34.666,32.929 ccw(c35.272,32.323) 34.415,32.323 ; 34.42,33.256 cw(c35.211,32.689) 35.211,33.663 ccw(c35.211,32.689) 34.42,33.256 ; 34.666,33.99 ccw(c35.455,34.779) 35.455,33.663 cw(c35.455,34.779) 34.666,33.99 ; 47.453,59.582 cw(c47.84,59.582) 47.567,59.855 ccw(c47.84,59.582) 47.453,59.582 ; v1@49.856,57.359 cw(c49.524,57.027) 49.993,57.027 ccw(c49.524,57.027) v1@49.856,57.359 ; v1@49.856,57.5 ccw(c49.524,57.832) 49.993,57.832 cw(c49.524,57.832) v1@49.856,57.5 ; 49.993,30.692 cw(c50.466,30.692) 50.132,31.026 ccw(c50.466,30.692) 49.993,30.692 ; 49.993,31.502 ccw(c50.466,31.502) 50.132,31.168 cw(c50.466,31.502) 49.993,31.502 ; 54.057,59.369 cw(c54.057,55.851) 56.545,58.339 ccw(c54.057,55.851) 54.057,59.369 ; 54.057,59.769 cw(c54.057,57.217) 55.862,59.022 ccw(c54.057,57.217) 54.057,59.769 ; 54.057,60.169 cw(c54.057,58.582) 55.18,59.705 ccw(c54.057,58.582) 54.057,60.169